# EAGLE board Rear_left_lamp_v3 (EAGLE 7.3.0)
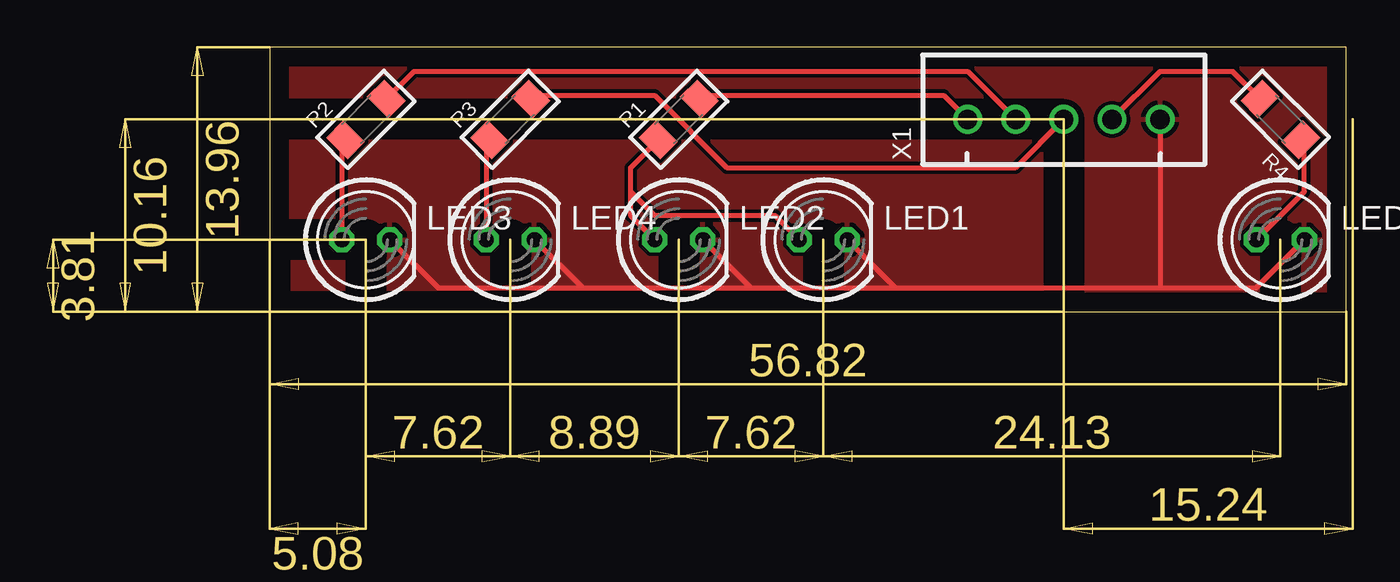
[diagram p0: board, top side]

Size 56.82 x 13.96 mm. Coordinates in mm from the lower left corner, seen from the top.
Outline: 0,0 56.82,0 56.82,13.96 0,13.96 0,0
Copper layers (1*16): Top 0.035mm / dielectric 1.5mm / Bottom 0.035mm
Design rules "default": minimum track width 10mil, minimum drill 24mil, track to track 8mil, track to pad 8mil, pad to pad 8mil, via to via 8mil, smd to smd 8mil, copper to edge 40mil, drill to drill 8mil, minimum pad ring 10mil, minimum via ring 8mil, stop-mask expansion 4mil, vias tented up to drill 0mil, thermal gap 10mil

## Footprints (pad centres in the part's own frame; a part is rotated, then mirrored left to right if it is on the bottom)
LED5MM = drill 0.813 octagon: A -1.27,0; K 1.27,0
R1206 = smd 1.3 x 1.6: 1 -1.524,0; 2 1.524,0
JST-XH-05-PACKAGE-ROUND-PAD = drill 1.016: 1 -5.08,0; 2 -2.54,0; 3 0,0; 4 2.54,0; 5 5.08,0

## Placement (x,y rotation side)
LED1  1.83 V  [LED5MM]  29.21,3.81 0 top
LED2  1.83 V  [LED5MM]  21.59,3.81 0 top
LED3  1.88 V  [LED5MM]  5.08,3.81 0 top
LED4  1.83 V  [LED5MM]  12.7,3.81 0 top
LED5  2.58 V  [LED5MM]  53.34,3.81 0 top
R1  3K3  [R1206]  21.59,10.16 45 top
R2  680  [R1206]  5.08,10.16 45 top
R3  1K  [R1206]  12.7,10.16 45 top
R4  4K7  [R1206]  53.34,10.16 135 top
X1  JST-XH-05-PIN-ROUND-PAD  [JST-XH-05-PACKAGE-ROUND-PAD]  41.91,10.16 0 top

## Library data of the parts
LED1 LED2 LED4 = led; COLOR: Red; CURRENT: 1.48 mA
LED3 = led; COLOR: Yellow; CURRENT: 1.42 mA
LED5 = led; COLOR: White; CURRENT: 0.14 mA
R1-R4 = rc-master-smd
X1 = Rembrandt Electronics - JST XH Connectors v1-0

## Nets
API_BREAK: R3.2 X1.3
API_START_ENGINE: LED1.A LED2.A R1.1
API_TURN_LEFT: R2.2 X1.2
API_WITHDRAW: R4.2 X1.4
GND: LED1.K LED2.K LED3.K LED4.K LED5.K X1.5
N$1: LED3.A R2.1
N$3: R1.2 X1.1
N$8: LED4.A R3.1
N$10: LED5.A R4.1

## Tracks (layer width: path | path; a pad name or v marks a point on that pad's centre or on a via)
API_BREAK
  Top 0.254: R3.2 13.97,11.43 20.32,11.43 24.13,7.62 39.37,7.62 X1.3
API_START_ENGINE
  Top 0.254: LED2.A 19.05,5.08 19.05,6.35 | 19.05,6.35 19.05,7.62 R1.1 | LED1.A 26.67,5.08 20.32,5.08 19.05,6.35
API_TURN_LEFT
  Top 0.254: R2.2 7.62,12.7 36.83,12.7 X1.2
API_WITHDRAW
  Top 0.254: R4.2 50.8,12.7 46.99,12.7 X1.4
GND
  Top 0.254: LED3.K 8.89,1.27 16.51,1.27 | 16.51,1.27 25.4,1.27 | 25.4,1.27 33.02,1.27 | 33.02,1.27 46.99,1.27 | 46.99,1.27 52.07,1.27 LED5.K | LED4.K 16.51,1.27 | LED2.K 25.4,1.27 | LED1.K 33.02,1.27 | X1.5 46.99,1.27
  pour Top: 0,13.97 57.15,13.97 57.15,0 0,0
N$1
  Top 0.254: R2.1 3.81,8.89 LED3.A
N$3
  Top 0.254: R1.2 22.86,11.43 35.56,11.43 X1.1
N$8
  Top 0.254: R3.1 11.43,8.89 LED4.A
N$10
  Top 0.254: LED5.A 54.61,6.35 54.61,8.89 R4.1